# EAGLE board PCB-TLY-JACK-LEDS (EAGLE 6.4)
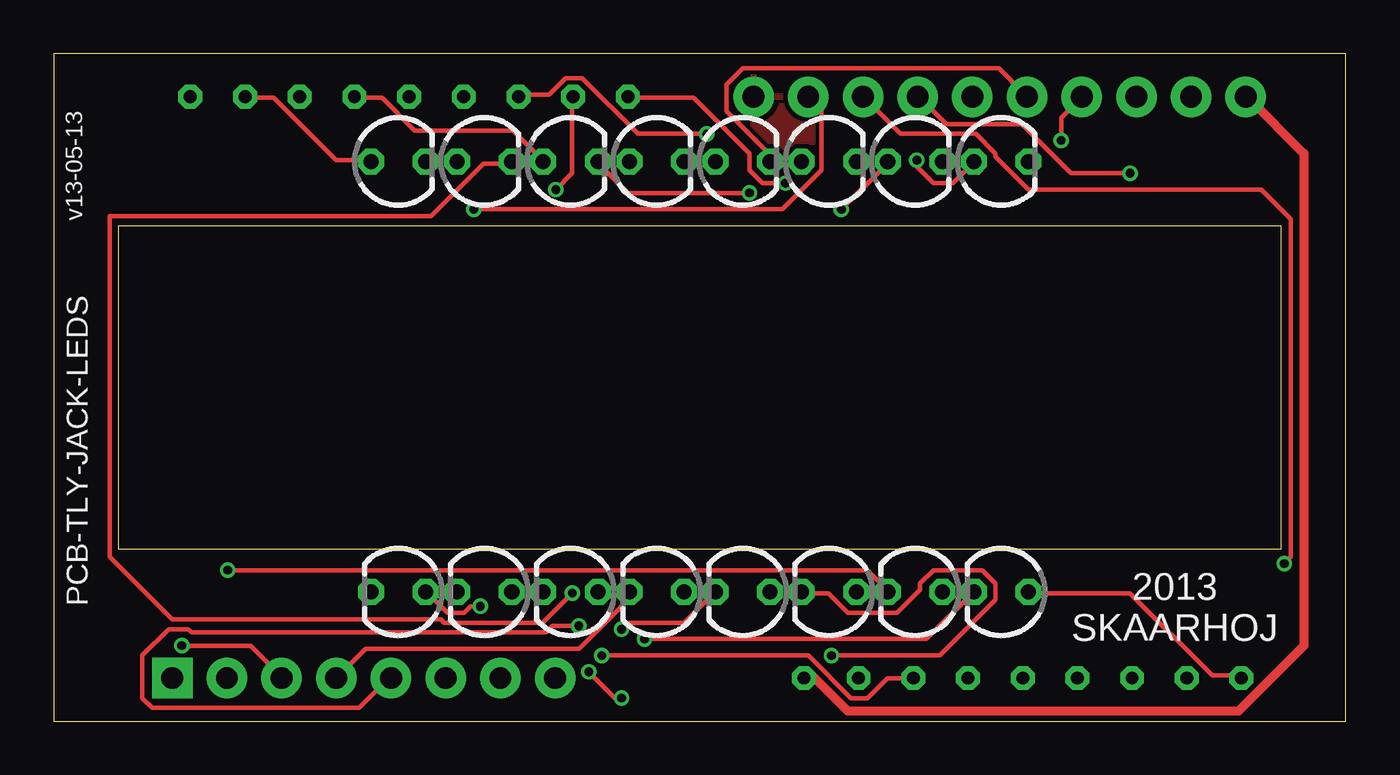
[diagram p0: board, top side]
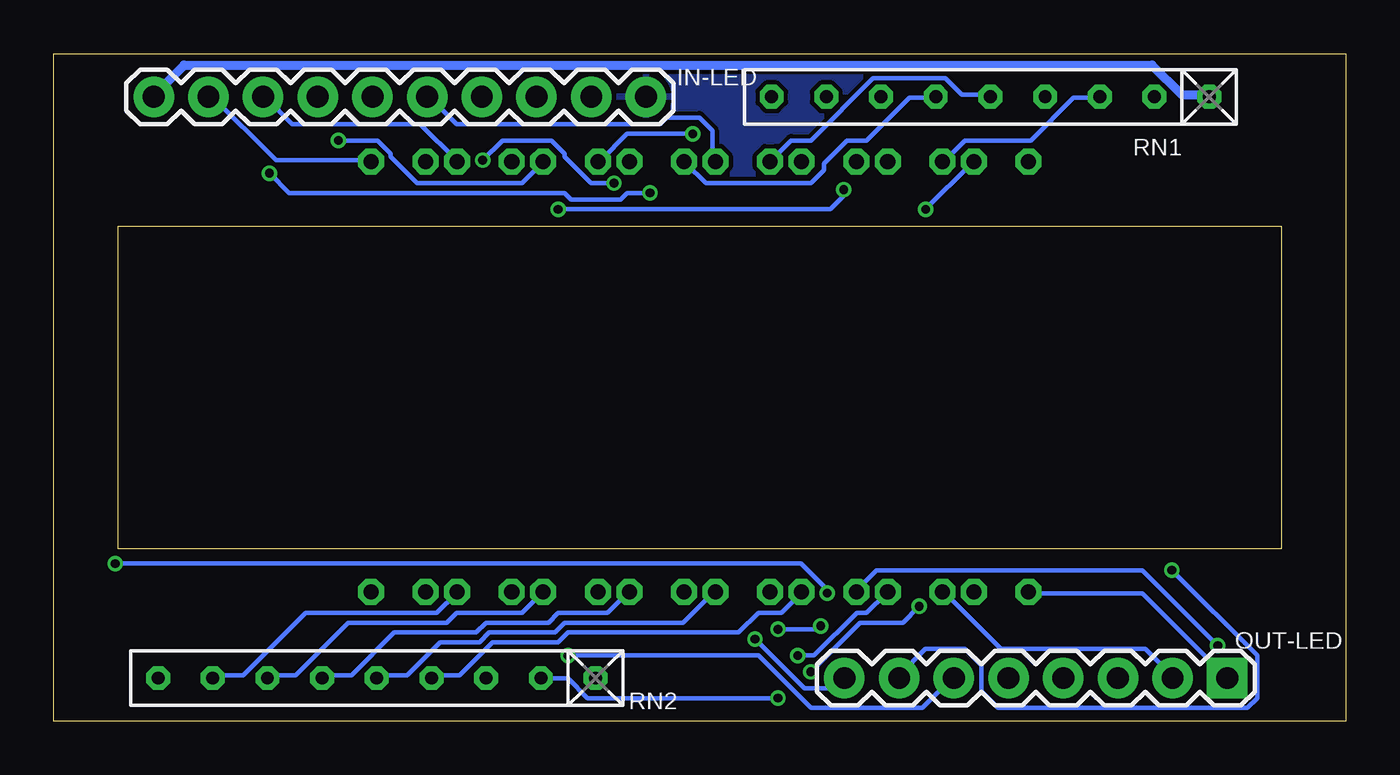
[diagram p1: board, bottom side, seen from below]

Size 60 x 31 mm. Coordinates in mm from the lower left corner, seen from the top.
Outline: 60,0 60,31 0,31 0,0 60,0
Copper layers (1*16): Top 0.035mm / dielectric 1.5mm / Bottom 0.035mm
Design rules "Fusion_eagle_rule_v1.1": minimum track width 6mil, minimum drill 12mil, track to track 6mil, track to pad 6mil, pad to pad 6mil, via to via 6mil, smd to smd 0mil, copper to edge 10mil, drill to drill 10mil, minimum pad ring 10mil, minimum via ring 6mil, stop-mask expansion 2mil, vias tented up to drill 100mil, thermal gap 10mil
Net classes: 0 default: width 0.203 mm, drill 0.406 mm, clearance 0.203 mm; 1 Power: width 0.406 mm, drill 0.61 mm, clearance 0.203 mm; 2 RELAY LINES: width 0.406 mm, drill 0.61 mm, clearance 0.203 mm; 3 INput lines: width 0.203 mm, drill 0.406 mm, clearance 0.203 mm
tRestrict: area 2.7,7.7 to 57.3,23.3
bRestrict: area 2.7,7.7 to 57.3,23.3
Milling: area 3,8 to 57,23

## Footprints (pad centres in the part's own frame; a part is rotated, then mirrored left to right if it is on the bottom)
1X10 = drill 1.016 pad 1.88: 1 0,0; 2 2.54,0; 3 5.08,0; 4 7.62,0; 5 10.16,0; 6 12.7,0; 7 15.24,0; 8 17.78,0; 9 20.32,0; 10 22.86,0
LED3MM = drill 0.7 pad 1.2 octagon: A -1.27,0; K 1.27,0
1X08 = drill 1.016 pad 1.88 square: 1 0,0 | drill 1.016 pad 1.88: 2 2.54,0; 3 5.08,0; 4 7.62,0; 5 10.16,0; 6 12.7,0; 7 15.24,0; 8 17.78,0
RN-9 = drill 0.6 octagon: 1 -10.16,0; 2 -7.62,0; 3 -5.08,0; 4 -2.54,0; 5 0,0; 6 2.54,0; 7 5.08,0; 8 7.62,0; 9 10.16,0

## Placement (x,y rotation side)
IN-LED  M10"  [1X10]  32.5,29 180 bottom
LED1  3mm LED  [LED3MM]  16,26 0 top
LED2  3mm LED  [LED3MM]  20,26 0 top
LED3  3mm LED  [LED3MM]  24,26 0 top
LED4  3mm LED  [LED3MM]  28,26 0 top
LED5  3mm LED  [LED3MM]  32,26 0 top
LED6  3mm LED  [LED3MM]  36,26 0 top
LED7  3mm LED  [LED3MM]  40,26 0 top
LED8  3mm LED  [LED3MM]  44,26 0 top
LED9  3mm LED  [LED3MM]  16,6 180 top
LED10  3mm LED  [LED3MM]  20,6 180 top
LED11  3mm LED  [LED3MM]  24,6 180 top
LED12  3mm LED  [LED3MM]  28,6 180 top
LED13  3mm LED  [LED3MM]  32,6 180 top
LED14  3mm LED  [LED3MM]  36,6 180 top
LED15  3mm LED  [LED3MM]  40,6 180 top
LED16  3mm LED  [LED3MM]  44,6 180 top
OUT-LED  [1X08]  5.5,2 180 bottom
RN1  [RN-9]  16.5,29 180 bottom
RN2  [RN-9]  45,2 180 bottom

## Library data of the parts
IN-LED OUT-LED = SparkFun
LED1-LED16 = SKAARHOJ
RN1 RN2 = SKAARHOJ; OC_FARNELL: unknown; OC_NEWARK: unknown

## Nets
5V [Power]: IN-LED.10 RN1.1 RN2.1
GND [Power]: IN-LED.1
IN1: IN-LED.2 LED1.K
IN2: IN-LED.3 LED2.K
IN3: IN-LED.4 LED3.K
IN4: IN-LED.5 LED4.K
IN5: IN-LED.6 LED5.K
IN6: IN-LED.7 LED6.K
IN7: IN-LED.8 LED7.K
IN8: IN-LED.9 LED8.K
N$1: LED1.A RN1.2
N$2: LED2.A RN1.3
N$3: LED3.A RN1.4
N$4: LED4.A RN1.5
N$5: LED5.A RN1.6
N$6: LED6.A RN1.7
N$7: LED7.A RN1.8
N$8: LED8.A RN1.9
N$9: LED9.A RN2.2
N$10: LED10.A RN2.3
N$11: LED11.A RN2.4
N$12: LED12.A RN2.5
N$13: LED13.A RN2.6
N$14: LED14.A RN2.7
N$15: LED15.A RN2.8
N$16: LED16.A RN2.9
O1: LED9.K OUT-LED.1
O2: LED10.K OUT-LED.2
O3: LED11.K OUT-LED.3
O4: LED12.K OUT-LED.4
O5: LED13.K OUT-LED.5
O6: LED14.K OUT-LED.6
O7: LED15.K OUT-LED.7
O8: LED16.K OUT-LED.8

## Tracks (layer width: path | path; a pad name or v marks a point on that pad's centre or on a via)
5V
  Top 0.406: RN2.1 34.9,1.98 35.36,1.98 36.88,0.46 55.02,0.46 58.06,3.5 58.06,26.36 55.47,28.96 IN-LED.10
  Bottom 0.406: RN1.1 6.4,29.11 7.62,29.11 8.99,30.48 53.95,30.48 55.32,29.11 IN-LED.10
GND
  pour Top: 0,0 60,0 60,31 0,31
  pour Bottom: 0,0 60,0 60,31 0,31
IN1  (via drill 0.41)
  Top 0.203: v19.51,23.77 33.83,23.77 35.66,25.6 35.66,28.35 35.05,28.96 IN-LED.2
  Bottom 0.203: v19.51,23.77 17.37,25.91 LED1.K
IN2  (via drill 0.41)
  Top 0.203: v24.08,5.94 22.71,4.57 18.14,4.57 17.98,4.72 5.49,4.72 2.59,7.62 2.59,23.47 17.53,23.47 19.96,25.91 21.18,25.91 LED2.K | v57.15,7.32 57.45,7.62 57.45,23.32 56.08,24.69 45.26,24.69 43.74,26.21 43.74,26.36 42.82,27.28 39.32,27.28 37.64,28.96 IN-LED.3
  Bottom 0.203: v24.08,5.94 24.08,6.1 25.3,7.32 v57.15,7.32
IN3  (via drill 0.41)
  Top 0.203: v32.31,24.54 26.67,24.54 25.3,25.91 LED3.K | v49.99,25.45 47.24,25.45 44.96,27.74 41.45,27.74 40.23,28.96 IN-LED.4
  Bottom 0.203: v32.31,24.54 33.38,24.54 33.68,24.23 35.97,24.23 36.27,24.54 49.07,24.54 v49.99,25.45
IN4
  Bottom 0.203: LED4.K 29.41,26.06 29.41,27.43 30.02,28.04 31.55,28.04 31.85,27.74 41.3,27.74 42.52,28.96 IN-LED.5
IN5
  Top 0.203: LED5.K 33.22,26.06 33.22,26.36 31.24,28.35 31.24,29.57 32,30.33 43.89,30.33 45.11,29.11 IN-LED.6
IN6  (via drill 0.41)
  Top 0.203: v46.79,26.98 46.79,28.04 47.7,28.96 IN-LED.7
  Bottom 0.203: v46.79,26.98 44.96,26.98 44.35,26.36 44.35,26.21 43.13,24.99 38.25,24.99 37.34,25.91 LED6.K
IN7
  Bottom 0.203: LED7.K 41.3,26.06 42.98,27.74 48.92,27.74 50.14,28.96 IN-LED.8
IN8
  Bottom 0.203: LED8.K 45.41,26.06 49.68,26.06 52.73,29.11 IN-LED.9
N$1
  Top 0.203: RN1.2 8.99,28.96 10.21,28.96 13.11,26.06 14.63,26.06 LED1.A
N$2
  Bottom 0.203: RN1.3 11.43,28.96 12.65,28.96 14.63,26.98 17.68,26.98 18.59,26.06 LED2.A
N$3
  Top 0.203: RN1.4 14.02,28.96 15.24,28.96 16.76,27.43 21.34,27.43 22.71,26.06 LED3.A
N$4
  Bottom 0.203: RN1.5 16.61,29.11 17.83,29.11 18.59,29.87 21.95,29.87 24.84,26.98 25.76,26.98 26.67,26.06 LED4.A
N$5
  Bottom 0.203: RN1.6 19.05,28.96 20.27,28.96 22.25,26.98 23.16,26.98 24.23,25.91 24.23,25.6 24.84,24.99 29.72,24.99 30.63,25.91 LED5.A
N$6  (via drill 0.41)
  Top 0.203: v30.33,27.28 27.13,27.28 24.54,29.87 23.77,29.87 23.01,29.11 21.64,29.11 RN1.7
  Bottom 0.203: v30.33,27.28 33.38,27.28 34.59,26.06 LED6.A
N$7  (via drill 0.41)
  Top 0.203: v23.32,24.69 24.08,25.45 24.08,28.96 RN1.8 | v36.58,23.77 38.71,25.91 LED7.A
  Bottom 0.203: v23.32,24.69 23.32,24.38 23.93,23.77 v36.58,23.77
N$8  (via drill 0.41)
  Top 0.203: v33.98,24.99 32.92,24.99 32.31,25.6 32.31,26.36 29.72,28.96 26.67,28.96 RN1.9 | v40.08,26.06 40.08,25.76 40.84,24.99 41.76,24.99 42.67,25.91 LED8.A
  Bottom 0.203: v33.98,24.99 35.05,24.99 36.27,26.21 36.27,26.36 36.88,26.98 39.17,26.98 v40.08,26.06
N$9  (via drill 0.41)
  Top 0.203: v26.36,1.07 26.06,1.07 v24.84,2.29 | v19.81,5.33 19.36,5.33 19.05,5.03 18.29,5.03 17.37,5.94 LED9.A
  Bottom 0.203: v26.36,1.07 35.2,1.07 36.12,1.98 37.34,1.98 RN2.2 | v24.84,2.29 22.55,4.57 20.57,4.57 v19.81,5.33
N$10  (via drill 0.41)
  Top 0.203: v25.45,3.05 35.05,3.05 37.03,1.07 37.8,1.07 38.71,1.98 39.78,1.98 RN2.3
  Bottom 0.203: v25.45,3.05 24.69,3.05 22.71,5.03 22.25,5.03 21.34,5.94 LED10.A
N$11
  Bottom 0.203: RN2.4 42.37,2.13 41.15,2.13 39.62,3.66 36.58,3.66 36.12,4.12 28.19,4.12 27.28,5.03 26.21,5.03 25.3,5.94 LED11.A
N$12
  Bottom 0.203: RN2.5 44.96,2.13 43.59,2.13 42.06,3.66 40.23,3.66 39.78,4.12 36.73,4.12 36.27,4.57 30.79,4.57 29.41,5.94 LED12.A
N$13
  Bottom 0.203: RN2.6 47.4,2.13 46.18,2.13 44.2,4.12 40.39,4.12 39.93,4.57 37.03,4.57 36.58,5.03 34.29,5.03 33.38,5.94 LED13.A
N$14
  Bottom 0.203: RN2.7 49.99,2.13 48.77,2.13 46.33,4.57 41.76,4.57 41.3,5.03 38.25,5.03 37.34,5.94 LED14.A
N$15
  Bottom 0.203: RN2.8 52.58,2.13 51.21,2.13 48.31,5.03 42.22,5.03 41.3,5.94 LED15.A
N$16
  Top 0.203: RN2.9 55.02,2.13 53.8,2.13 49.99,5.94 45.41,5.94 LED16.A
O1
  Bottom 0.203: LED9.K 14.63,5.94 9.45,5.94 5.64,2.13 OUT-LED.1
O2
  Bottom 0.203: LED10.K 18.59,5.94 16,3.35 9.3,3.35 8.08,2.13 OUT-LED.2
O3  (via drill 0.41)
  Top 0.203: v5.94,3.5 9.14,3.5 10.52,2.13 OUT-LED.3
  Bottom 0.203: v5.94,3.5 9.45,7.01 21.79,7.01 22.71,6.1 LED11.K
O4
  Top 0.203: LED12.K 26.67,5.94 26.67,5.64 24.38,3.35 14.48,3.35 13.26,2.13 OUT-LED.4
O5  (via drill 0.41)
  Top 0.203: v26.36,4.27 26.67,4.57 29.26,4.57 30.63,5.94 LED13.K | v24.38,4.42 23.16,4.42 22.86,4.12 6.4,4.12 6.25,4.27 5.33,4.27 4.12,3.05 4.12,1.07 4.57,0.61 14.17,0.61 15.54,1.98 OUT-LED.5
  Bottom 0.203: v26.36,4.27 24.54,4.27 v24.38,4.42
O6  (via drill 0.41)
  Top 0.203: v36.12,3.05 41.15,3.05 43.74,5.64 43.74,6.4 43.13,7.01 40.84,7.01 40.23,6.4 40.23,6.1 39.17,5.03 36.88,5.03 35.97,5.94 34.75,5.94 LED14.K
  Bottom 0.203: v36.12,3.05 27.28,3.05 24.84,0.61 19.66,0.61 18.29,1.98 OUT-LED.6
O7  (via drill 0.41)
  Top 0.203: v8.08,7.01 37.8,7.01 38.71,6.1 LED15.K
  Bottom 0.203: v8.08,7.01 4.12,3.05 4.12,1.07 4.57,0.61 16.15,0.61 16.92,1.37 16.92,2.59 17.68,3.35 19.51,3.35 20.73,2.13 OUT-LED.7
O8  (via drill 0.41)
  Top 0.203: v27.43,3.81 40.54,3.81 42.67,5.94 LED16.K
  Bottom 0.203: v27.43,3.81 25.15,1.52 23.77,1.52 23.32,1.98 OUT-LED.8

## Text on the board
_tsilk: v13-05-13 | PCB-TLY-JACK-LEDS | 2013 / SKAARHOJ